# Altium PCB LED_GROUP.PcbDoc
Units mm, origin at the board's own origin, x right, y up, seen from the top; angles counter-clockwise.
Board outline 46.99 x 46.99 mm, 2 copper layers (Top Layer, Bottom Layer); 9 components, 7 nets, 21 pads, 4 vias.
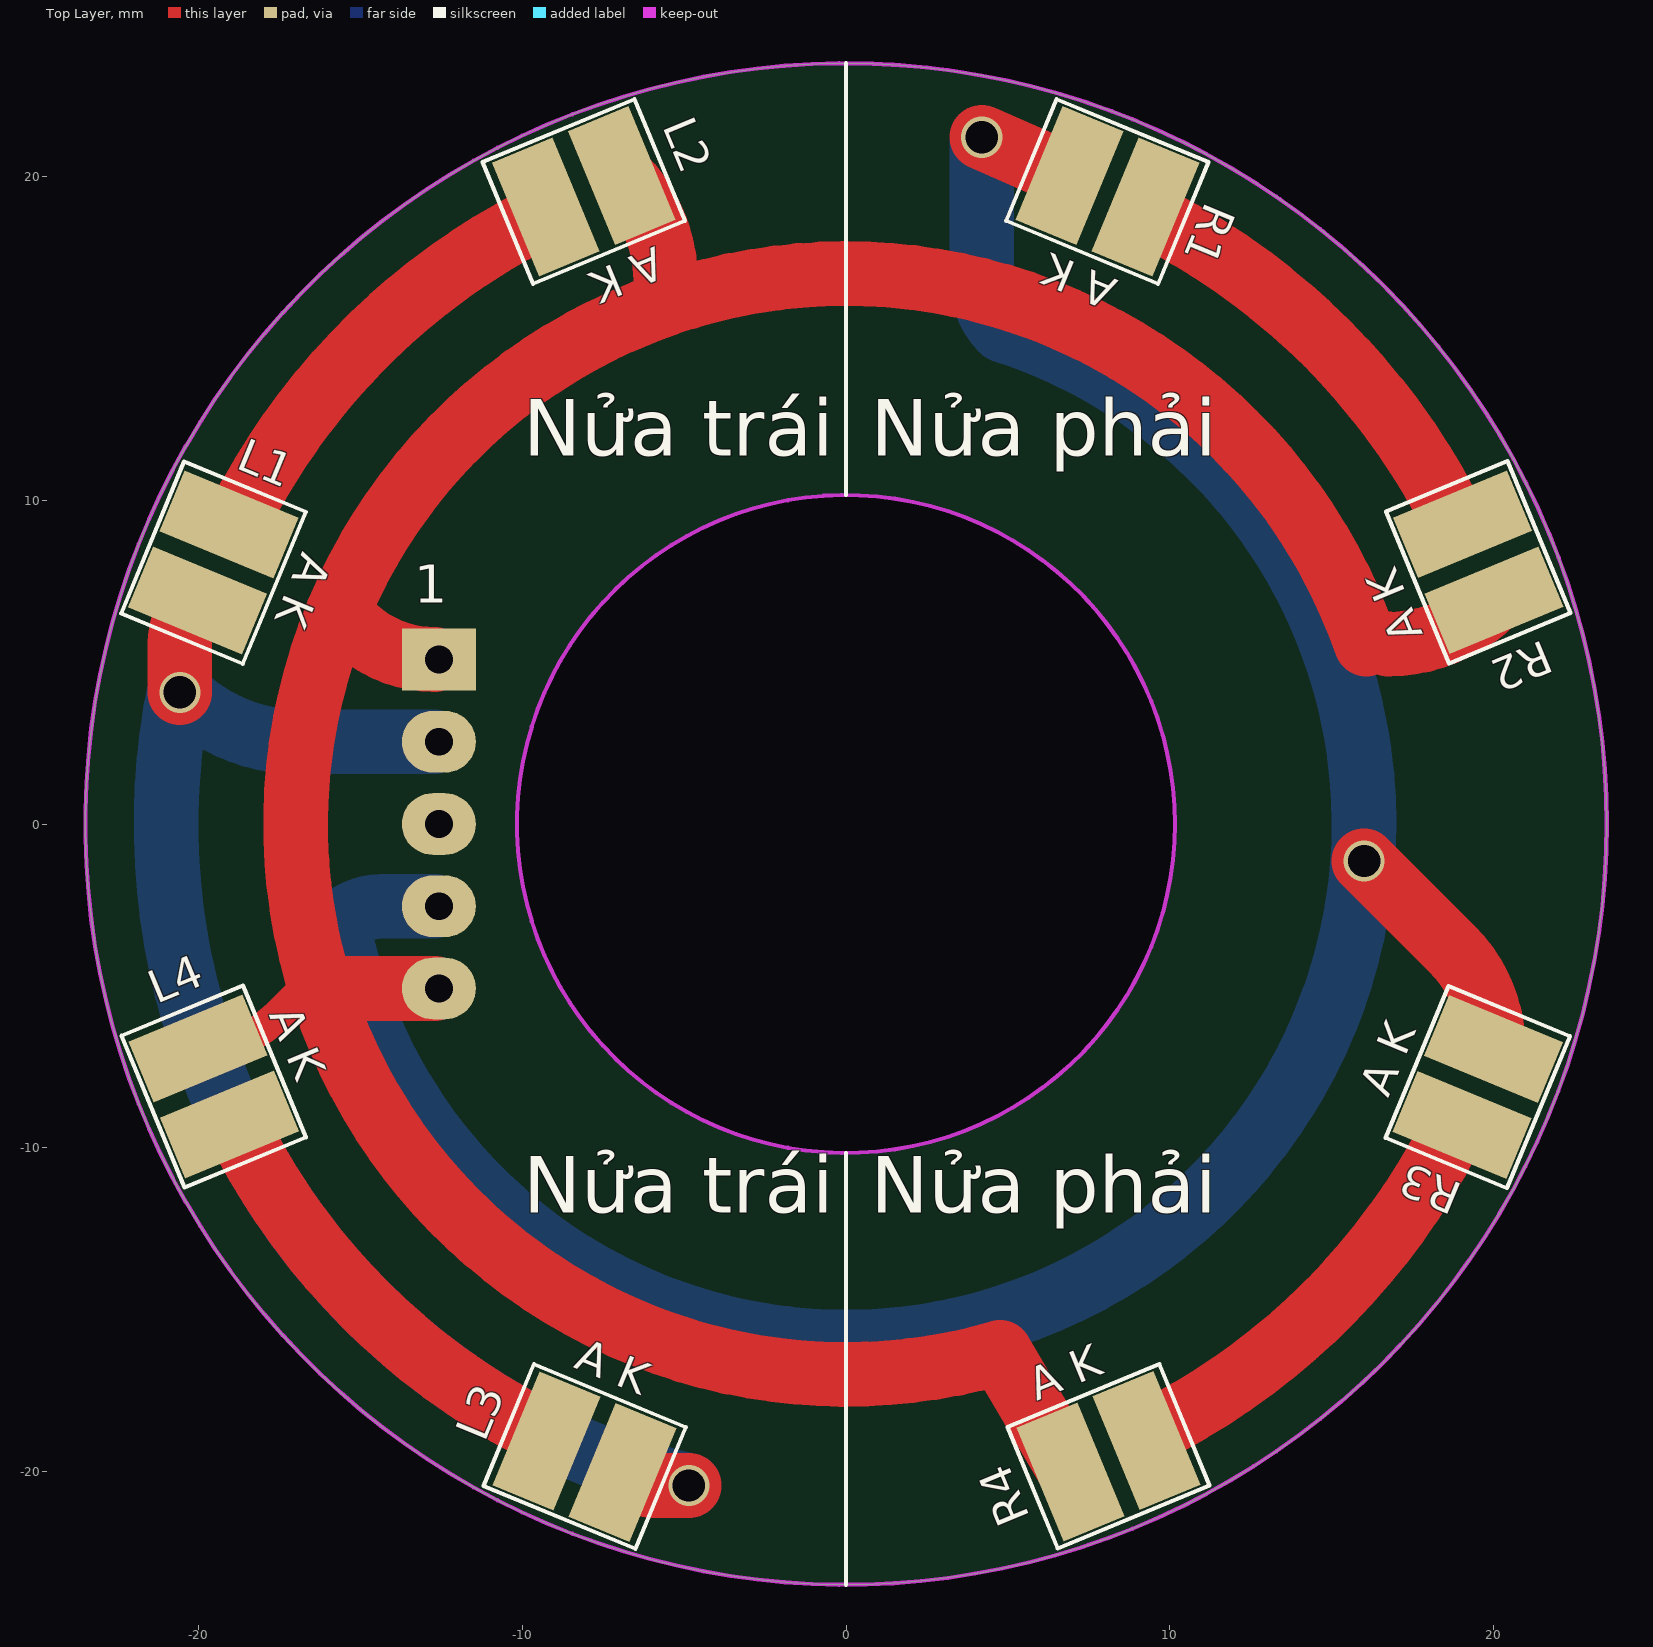
[diagram p0: Top Layer view]
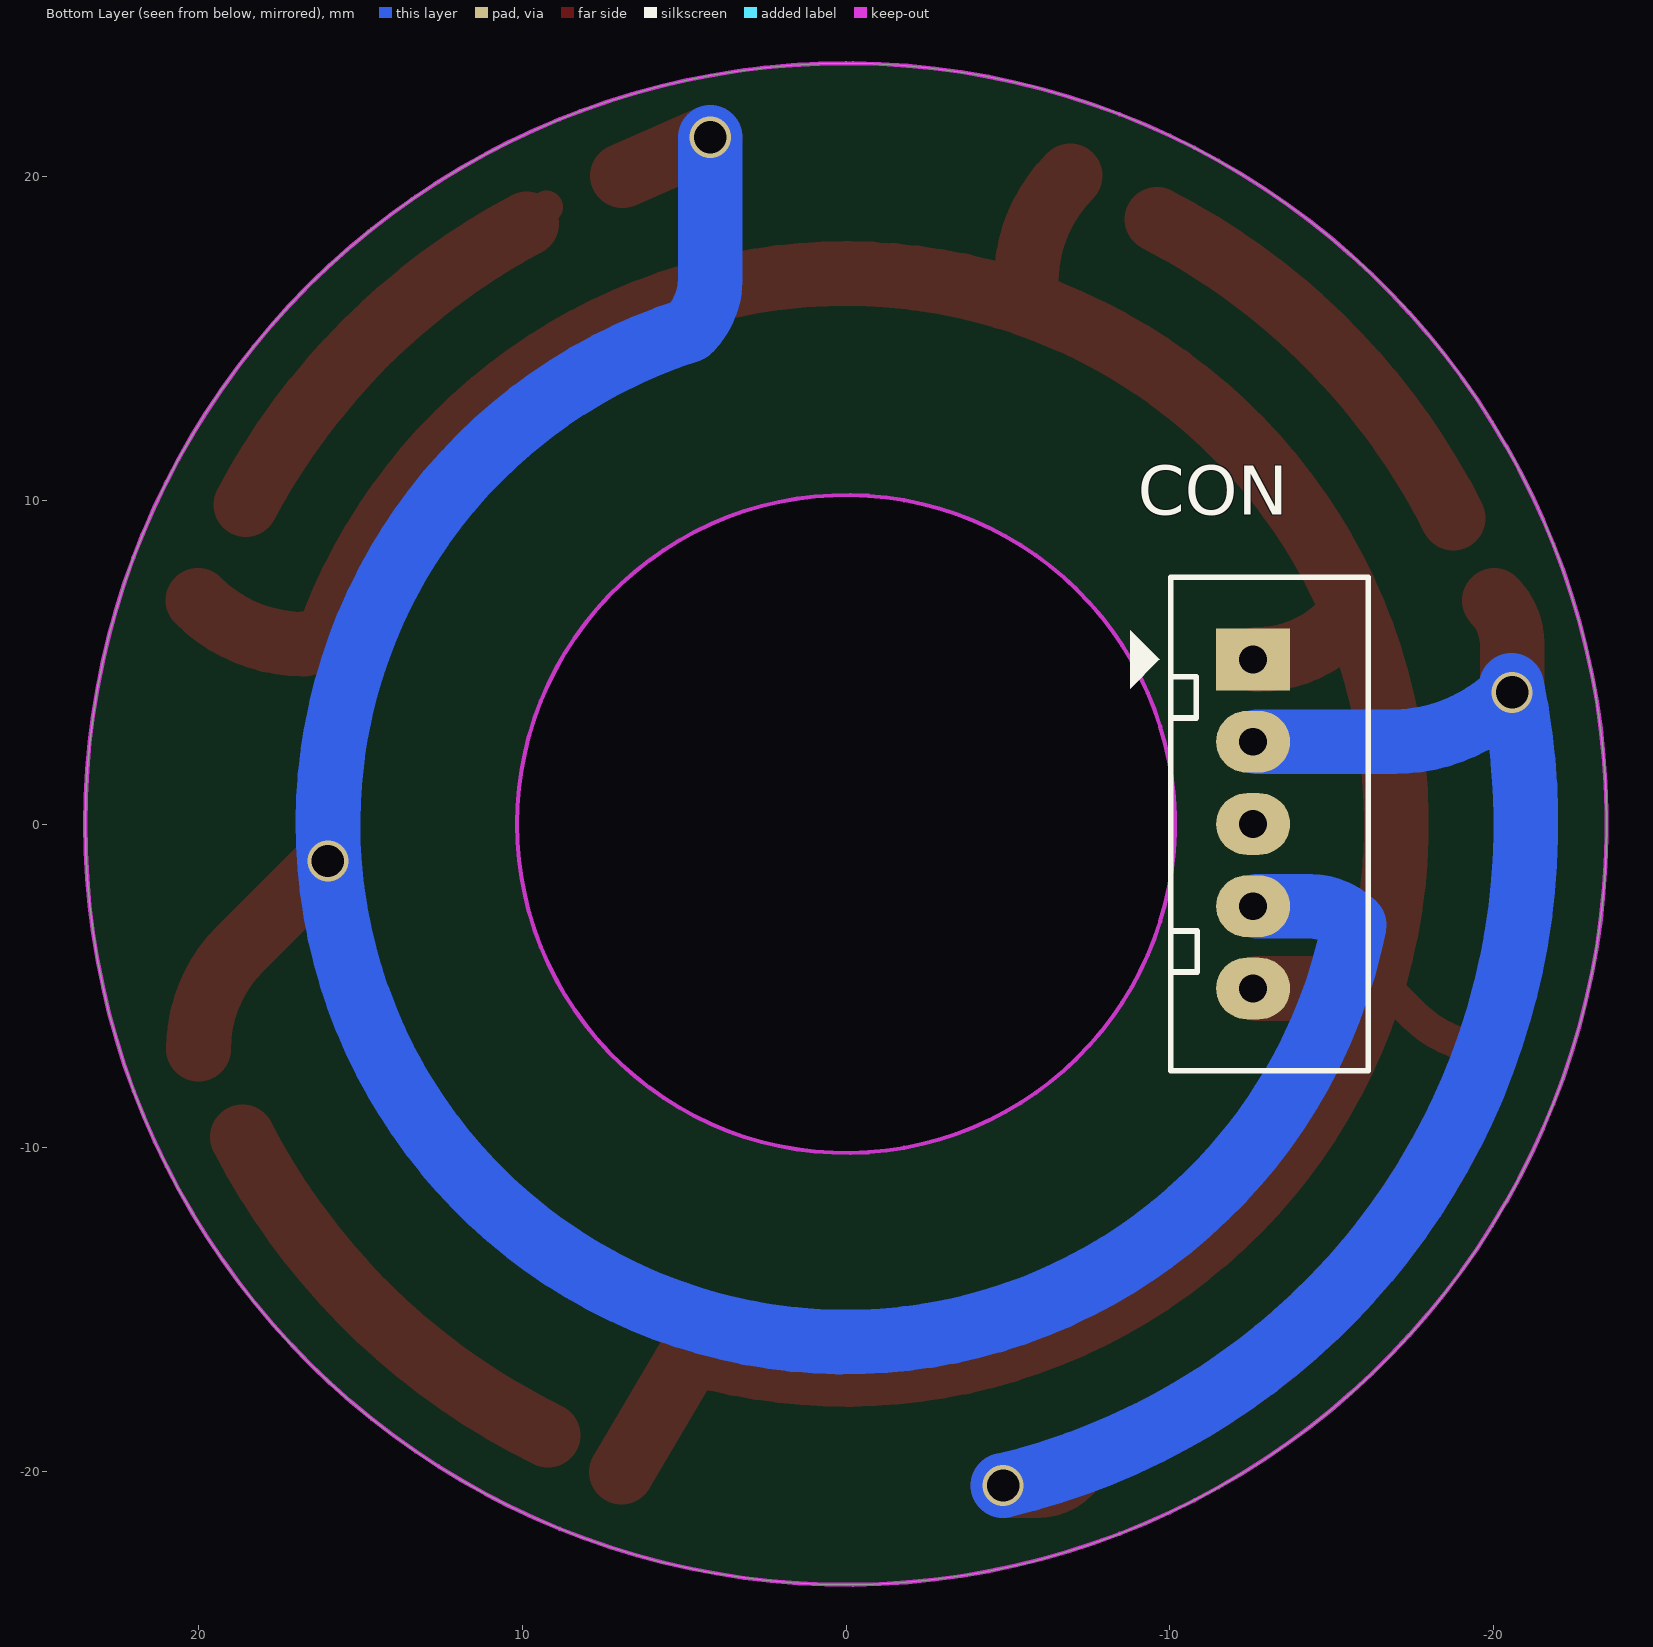
[diagram p1: Bottom Layer view, seen from below]
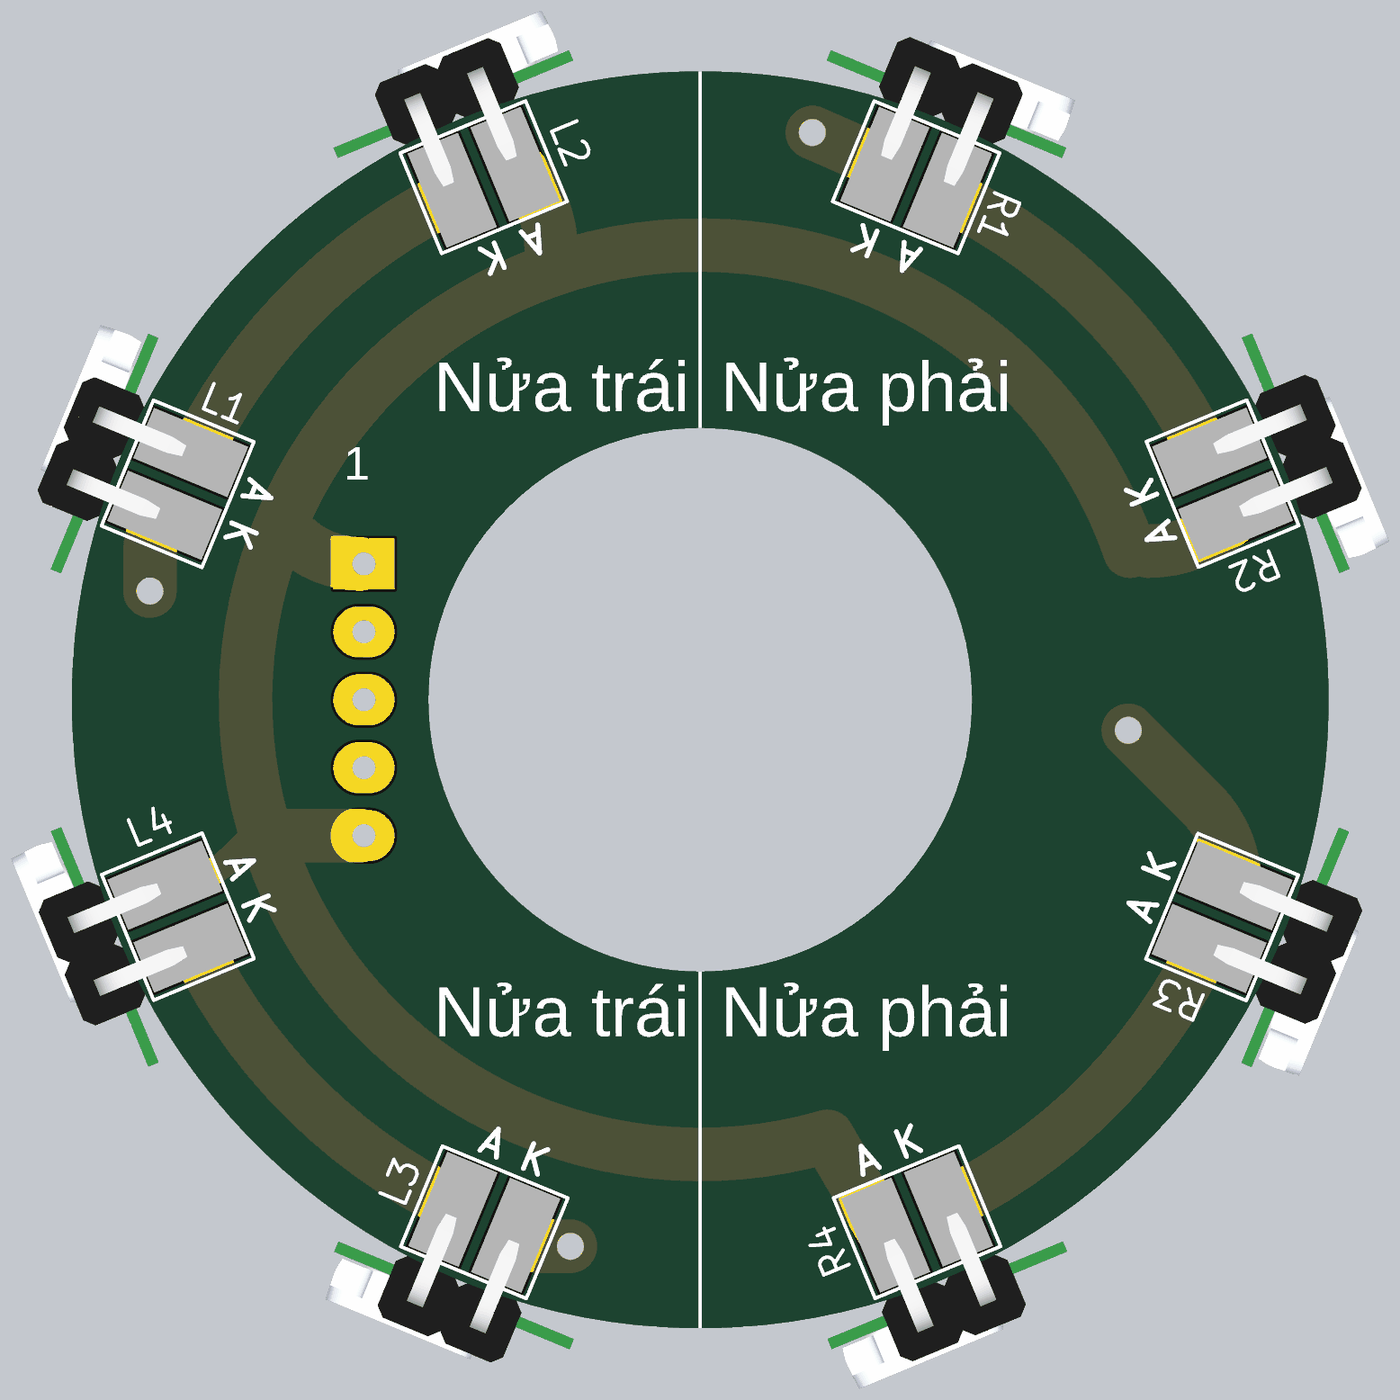
[diagram p2: 3D render of the assembled board from above, using the file's embedded part models]

## Layer stack, top to bottom
Top Solder: solder mask 0.0102, Solder Resist, Dk 3.5
Top Layer: signal copper 0.0356
Dielectric 1: dielectric 0.32, FR-4, Dk 4.8
Bottom Layer: signal copper 0.0356
Bottom Solder: solder mask 0.0102, Solder Resist, Dk 3.5

## Board outline
-23.495,0 ccw(c0,0) 0,-23.495 ccw(c0,0) 23.495,0 ccw(c0,0) 0,23.495 ccw(c0,0)
cut-out: -10.16,0 ccw(c0,0) 0,-10.16 ccw(c0,0) 10.16,0 ccw(c0,0) 0,10.16 ccw(c0,0)

## Design rules (kind name [scope] priority, off if disabled: settings)
Clearance [All] p1: gap=0.254 ignorepadtopadclearanceinfootprint=FALSE except(0: Arc-Hole Track-Hole SMDPad-Hole THPad-Hole Via-Hole Fill-Hole Poly-Hole Region-Hole Text-Hole)
PolygonConnect [All] p1: connectstyle=Relief reliefconductorwidth=0.254 reliefentries=4 polygonreliefangle="90 Angle" airgapwidth=0.254
RoutingVias [All] p1: holewidth=0.711 width=1.27 viastyle="Through Hole" minholewidth=0.7 minwidth=1.2 maxholewidth=5 maxwidth=5
SilkToSolderMaskClearance [IsPad] p1: minsilkscreentomaskgap=0.1 clearancetoexposedcopper=TRUE
SolderMaskExpansion [All] p1: expansion=0.102
Width [All] p1: maxlimit=2 minlimit=0.254 preferedwidth=0.254
29 further rules are at their usual default settings.

## Components (designator, comment, footprint, x,y, rotation, side; value= is the part's Value field where it differs from the comment)
CON "Giắc XH 5P 2.54 chống cắm ngược chiều" XH_5P_254 -12.573,5.08 r90 bottom value="Connector 5"
L1 "Mạch đèn LED bên trái" "LED OSRAM CIRCUIT" -19.05,9.246 r247.5 top locked
L2 "Mạch đèn LED bên trái" "LED OSRAM CIRCUIT" -6.924,20.022 r202.5 top locked
L3 "Mạch đèn LED bên trái" "LED OSRAM CIRCUIT" -9.246,-19.05 r337.5 top
L4 "Mạch đèn LED bên trái" "LED OSRAM CIRCUIT" -20.015,-6.934 r292.5 top
R1 "Mạch đèn LED bên phải" "LED OSRAM CIRCUIT" 9.246,19.05 r157.5 top
R2 "Mạch đèn LED bên phải" "LED OSRAM CIRCUIT" 20.015,6.909 r112.5 top
R3 "Mạch đèn LED bên phải" "LED OSRAM CIRCUIT" 19.025,-9.296 r67.5 top
R4 "Mạch đèn LED bên phải" "LED OSRAM CIRCUIT" 6.934,-20.015 r22.5 top

## Footprints (in the part's own frame and the unit in brackets; to place one, negate y for a bottom-side part, rotate by r counter-clockwise, add the part's x,y. Pads: shape width x height; smd on the part's side, far side on the other; paste and mask are expansions set on the pad)
"LED OSRAM CIRCUIT" [mil]
  rect 80x150 smd: A(0,0) K(100,0)
  silkscreen extent -50,-80 150,80, body extent -137,-194 237,-10, height 26
XH_5P_254 [mil]
  rect 75x90 hole 34: 1(0,0)
  oval 75x90 hole 34: 2(-100,0) 3(-200,0) 4(-300,0) 5(-400,0)
  silkscreen extent -500,-140 100,150, body extent -539,-146 146,150, height 304

## Part data
CON: library part Con5, "Connector 5"
L1 L2 L3 L4 R1 R2 R3 R4: library part Led

## Via types
v1: diameter 1.27, hole 1, Top Layer to Bottom Layer, tented both sides, 4 vias

## Nets (pads, with @x,y where several pads share a name; then routed paths per layer and width w, separated by ;. In a path a pad name is that pad's centre, name@x,y a point inside that pad or via, vN(x,y) a via of type N, cw(c..) or ccw(c..) an arc to the next point about the centre after c; other vN are vias at no path point)
Anode: CON.1 CON.5 L2.A L4.A R2.A R4.A | length 103.8
  Top Layer w1: L4.A ccw(c-20.015,-3.44) -17.544,-5.911 -16.337,-4.703 ccw(c-15.426,-3.792) -15.426,-5.08 ; -15.686,6.554 -15.281,6.149 ; -5.565,16.063 -5.565,16.741 ; 16.067,5.556 16.749,5.556
  Top Layer w2: -15.426,-5.08 CON.5@-12.7,-5.08 ; -15.281,6.149 ccw(c-12.7,8.73) CON.1@-12.7,5.08 ; L2.A cw(c-10.206,16.741) -5.565,16.741 ; R4.A 4.755,-16.321 cw(c0,0) -16.337,-4.703 cw(c0,0) -15.686,6.554 cw(c0,0) -5.565,16.063 cw(c0,0) 16.067,5.556 ; 16.749,5.556 ccw(c16.749,10.175) R2.A
LEFT_CONTROL: CON.2 L1.K L3.K | length 45.8
  Top Layer w2: v1(-20.574,4.064) -20.574,5.566 cw(c-18.689,5.566) L1.K ; L3.K ccw(c-5.91,-19.033) -5.91,-20.432 v1(-4.853,-20.432)
  Bottom Layer w2: v1(-20.574,4.064) ccw(c-16.895,7.743) -16.895,2.54 CON.2@-12.7,2.54 ; v1@-20.558,4.288 ccw(c0,0) v1(-4.853,-20.432)
NetL1_A: L1.A L2.K | length 13.2
  Top Layer w2: L1.A@-18.757,9.444 cw(c0,0) L2.K@-9.604,18.675
NetL3_A: L3.A L4.K | length 12.7
  Top Layer w2: L4.K@-18.589,-9.769 ccw(c0,0) L3.A@-9.749,-18.6
NetR1_A: R1.A R2.K | length 12.5
  Top Layer w1.016: R1.A R1.A@9.249,19.05
  Top Layer w2: R1.A@9.859,18.542 cw(c0,0) R2.K@18.542,9.859
NetR3_A: R3.A R4.K | length 13.4
  Top Layer w2: R4.K@9.206,-18.875 ccw(c0,0) R3.A@18.642,-9.669
RIGHT_CONTROL: CON.4 R1.K R3.K | length 86.9
  Top Layer w2: v1(4.191,21.209) R1.K ; v1(16.002,-1.143) 18.715,-3.856 cw(c15.622,-6.95) R3.K
  Bottom Layer w2: CON.4@-12.7,-2.54 -14.309,-2.54 ccw(c-14.309,-4.499) -15.694,-3.114 ccw(c0,0) 4.845,15.249 cw(c6.425,16.828) 4.191,16.828 v1(4.191,21.209)
pads on no net: CON.3

## Keep-outs
Keep-Out Layer:
  circle w0.127: c0,0 r23.495
  circle w0.127: c0,0 r10.16
  lines w0.127: 0,23.495 cw(c0,0) 23.495,0

## Silkscreen, mask and mechanical layers (free items; w line width, h text height)
Top Overlay:
  lines w0.127: 0,-23.495 0,-10.16 ; 0,10.16 0,23.495
  text "Nửa trái" at -9.965,10.795 h3
  text "Nửa phải" at 0.762,10.795 h3
  text "1" at -13.335,6.445 h2
  text "Nửa trái" at -9.965,-12.573 h3
  text "Nửa phải" at 0.762,-12.573 h3

## Text inside footprints (layer, text, board x,y; h text height)
L1: Top Overlay "A K" at -16.772,8.44 h1 r247.5
L2: Top Overlay "A K" at -5.884,17.841 h1 r202.5
L3: Top Overlay "A K" at -8.44,-16.772 h1 r337.5
L4: Top Overlay "A K" at -17.834,-5.893 h1 r292.5
R1: Top Overlay "A K" at 8.44,16.772 h1 r157.5
R2: Top Overlay "A K" at 17.834,5.868 h1 r112.5
R3: Top Overlay "A K" at 16.747,-8.49 h1 r67.5
R4: Top Overlay "A K" at 5.893,-17.834 h1 r22.5